# Altium PCB Copy of logger_layout_v2.PcbDoc
Units mil, origin at the board's own origin, x right, y up, seen from the top; angles counter-clockwise.
Board outline 600 x 600 mil, 4 copper layers (Top Layer, PWR, GND, Bottom Layer), stack 23.778 mil thick; 42 components, 76 nets, 174 pads, 71 vias.
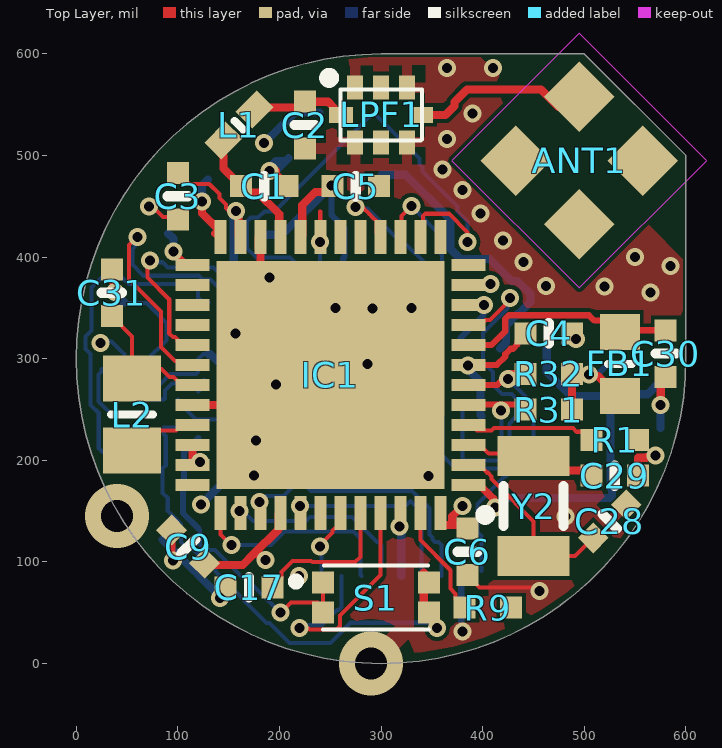
[diagram p0: Top Layer view]
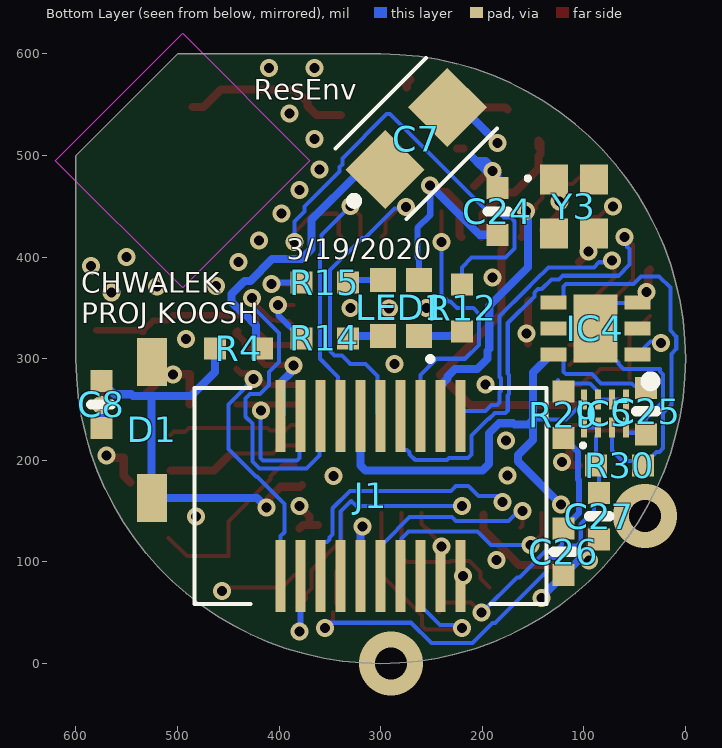
[diagram p1: Bottom Layer view, seen from below]
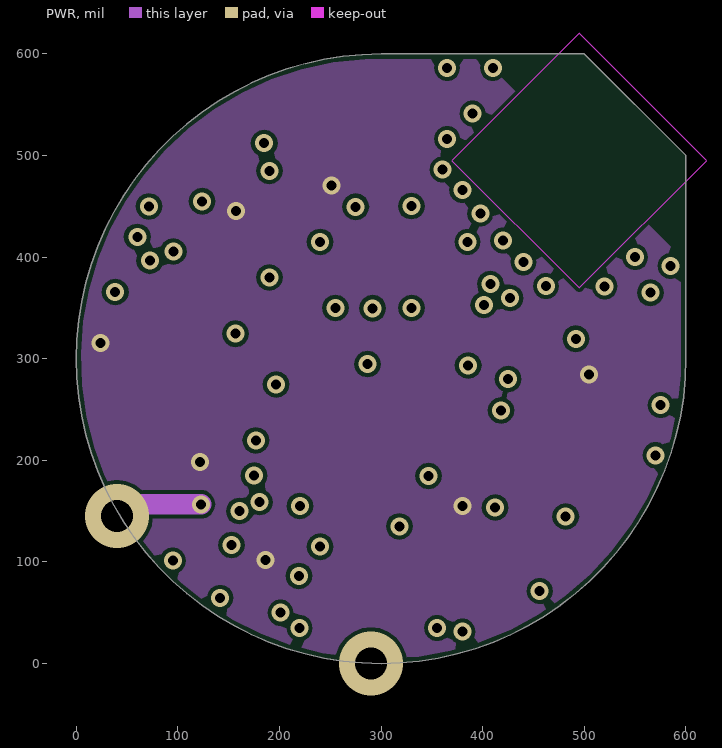
[diagram p2: PWR]
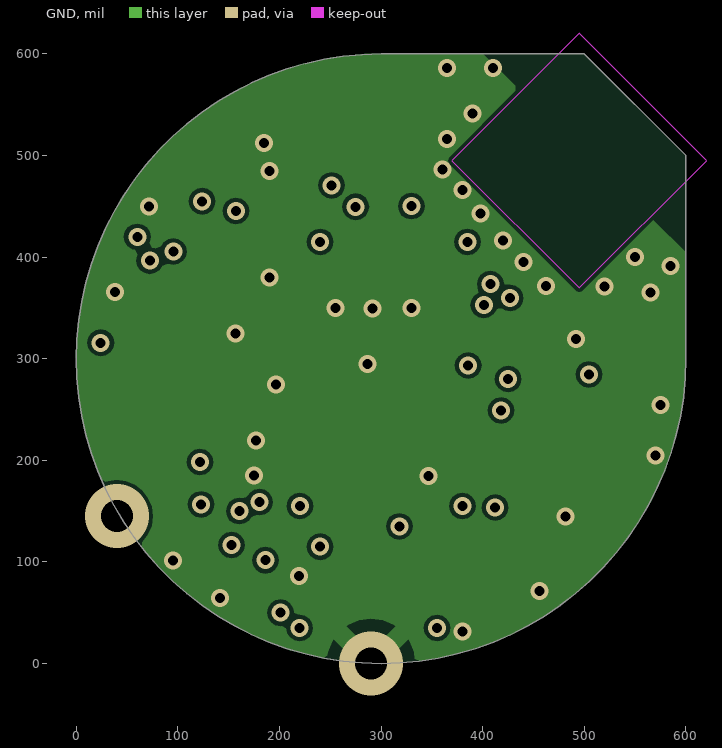
[diagram p3: GND]

## Layer stack, top to bottom
Top Solder: solder mask 0.394, Solder Resist, Dk 3.5
Top Layer: signal copper 1.417
Dielectric 2: prepreg 2.795, PP-006, Dk 4.1
PWR: signal copper 1.378
Dielectric 1: dielectric 12.598, FR-4, Dk 4.8
GND: signal copper 1.378
Dielectric 3: prepreg 2.795, PP-006, Dk 4.1
Bottom Layer: signal copper 1.417
Bottom Solder: solder mask 0.394, Solder Resist, Dk 3.5

## Board outline
600,300 cw(c300,300) 300,600 500,600 600,500

## Design rules (kind name [scope] priority, off if disabled: settings)
Clearance [All] p1: gap=4 ignorepadtopadclearanceinfootprint=FALSE except(0: Arc-Hole Track-Hole SMDPad-Hole THPad-Hole Via-Hole Fill-Hole Poly-Hole Region-Hole Text-Hole)
PlaneConnect PWR [InNet('GND') or InNet('3.3V') or InNet('VBAT')] p1: planeconnectstyle=Relief reliefexpansion=20 reliefentries=4 reliefconductorwidth=10 reliefairgap=10
PlaneConnect [All] p2: planeconnectstyle=Relief reliefexpansion=20 reliefentries=4 reliefconductorwidth=10 reliefairgap=10
PolygonConnect [All] p1: connectstyle=Relief reliefconductorwidth=10 reliefentries=4 polygonreliefangle="90 Angle" airgapwidth=10
RoutingVias [All] p1: holewidth=9.84 width=17.72 viastyle="Through Hole" minholewidth=9.84 minwidth=17.72 maxholewidth=9.84 maxwidth=17.72
SolderMaskExpansion [All] p1: expansion=4 istentingtop=FALSE
Width [All] p1: maxlimit=10 minlimit=4 preferedwidth=10 toplayer_maxwidth=8 toplayer_prefwidth=6 midlayer1_minwidth=10 midlayer2_minwidth=10 bottomlayer_maxwidth=8 bottomlayer_prefwidth=6 minimp=50.000000 maximp=50.000000 favimp=50.000000
29 further rules are at their usual default settings.

## Classes and differential pairs
component class logger_connector: J1
component class logger_periph: C28 C29 C30 C31 FB1 L2 R31 R32 Y2 Y3
component class logger_sensors: C17 LED1 R9 R12 R14 R15
component class logger_power: C24 C25 C26 C27 IC4 IC5 R29 R30 S1
component class logger_mcu: ANT1 C1 C2 C3 C4 C5 C6 C7 C8 C9 D1 IC1 L1 LPF1 R1 R4

## Components (designator, comment, footprint, x,y, rotation, side; value= is the part's Value field where it differs from the comment)
ANT1 "2065130001" 2065130001 495,495 r45 top
C1 "0.80pF" SMD-0402C 185,470 r90 top
C2 "0.30pF" SMD-0402C 225,530 r180 top
C3 "0.10µF" SMD-0402C 100,460 r0 top
C4 "0.10µF" SMD-0402C 465,325 r90 top
C5 "0.10µF" SMD-0402C 275,470 r90 top
C6 "100pF" SMD-0402C 385,110 r0 top
C7 "CPH3225A" CPH3225A 265,500 r135 bottom
C8 "0.10µF" SMD-0402C 575,255 r180 bottom
C9 "0.10µF" SMD-0402C 110,115 r225 top
C17 "10000pF" SMD-0402C 170,75 r90 top
C24 "1µF" SMD-0402C 185,445 r0 bottom
C25 "1µF" SMD-0402C 38.9,248.24 r180 bottom
C26 "1µF" SMD-0402C 120,110 r180 bottom
C27 "10000pF" SMD-0402C 85,145 r0 bottom
C28 "15pF" SMD-0402C 525,140 r135 top
C29 "15pF" SMD-0402C 530,185 r90 top
C30 "0.10µF" SMD-0402C 580,305 r0 top
C31 "4.7µF" SMD-0402C 35,365 r180 top
D1 "1N5819HW-7-F" SOD3716X145N 525,230 r90 bottom
FB1 "BLM18KG601SZ1D" BEADC1608X95N 535,295 r270 top
IC1 "STM32WB55CGU6" QFN50P700X700X65-49N-D 250,284.17 r180 top
IC4 "NCP718BMT330TBG" SON65P200X200X80-7N 88.66,330 r0 bottom
IC5 "74LVC2G00GS,115" 74AXP2T3407GSX 79.33,246.22 r180 bottom
J1 "0529910208" 0529910208 310,165 r0 bottom
L1 "LQG15HS2N7S02D" INDC1005X55N 160,530 r45 top
L2 "LBR2012T100K" INDC2012X145N 55,245 r90 top
LED1 "EAST1616RGBB6" EAST1616RGBB6 280,350 r180 bottom
LPF1 "LFL212G45TC1A007" LFL212G45TC1A007 300,540 r0 top
R1 "100k" SMD-0402-RES 530,220 r270 top
R4 "100" SMD-0402-RES 440,310 r270 bottom
R9 "1k" SMD-0402-RES 405,55 r90 top
R12 "110" SMD-0402-RES 220,350 r180 bottom
R14 "30" SMD-0402-RES 355,320 r90 bottom
R15 "24" SMD-0402-RES 355,375 r270 bottom
R29 "100k" SMD-0402-RES 120,245 r180 bottom
R30 "100k" SMD-0402-RES 65,195 r90 bottom
R31 "10k" SMD-0402-RES 465,250 r90 top
R32 "10k" SMD-0402-RES 465,285 r90 top
S1 "EVP-BB4A9B000" EVPBB2A9B000 285,65 r0 top
Y2 "NX3215SA-32.768K-STD-MUA-8" NX3215SA 450,155 r90 top
Y3 "XRCGB32M000F1H01R0" XRCGB32M000F1H01R0 110,450 r270 bottom

## Footprints (in the part's own frame and the unit in brackets; to place one, negate y for a bottom-side part, rotate by r counter-clockwise, add the part's x,y. Pads: shape width x height; smd on the part's side, far side on the other; paste and mask are expansions set on the pad)
74AXP2T3407GSX [mm]
  rect 0.15x0.5 smd: 1(-0.525,-0.35) 2(-0.175,-0.35) 3(0.175,-0.35) 4(0.525,-0.35) 5(0.525,0.35) 6(0.175,0.35) 7(-0.175,0.35) 8(-0.525,0.35)
  silkscreen extent -0.6,-0.85 -0.5,-0.75, body extent -0.67,-0.5 0.67,0.5, height 0.45
0529910208 [mm]
  rect 0.25x1.8 smd: 1(-2.25,-2) 2(-2.25,2) 3(-1.75,-2) 4(-1.75,2) 5(-1.25,-2) 6(-1.25,2) 7(-0.75,-2) 8(-0.75,2) 9(-0.25,-2) 10(-0.25,2) 11(0.25,-2) 12(0.25,2) 13(0.75,-2) 14(0.75,2) 15(1.25,-2) 16(1.25,2) 17(1.75,-2) 18(1.75,2) 19(2.25,-2) 20(2.25,2)
  silkscreen extent -4.4,-2.7 4.4,2.7, body extent -4.4,-2.7 4.4,2.7, height 2.28
2065130001 [mm]
  rect 1.25x1.25 smd: 1(1.125,1.125) 2(1.125,-1.125) 3(-1.125,-1.125) 4(-1.125,1.125)
  Keep-Out Layer region: -2.25,-2.25 2.25,-2.25 2.25,2.25 -2.25,2.25
  body extent -1.51,-1.48 1.49,1.52, height 4
BEADC1608X95N [mm]
  rect 0.9x1 smd: 1(-0.8,0) 2(0.8,0)
  silkscreen extent 0,-0.3 0,0.3, body extent -0.8,-0.4 0.8,0.4, height 0.95
CPH3225A [mm]
  rect 1.4x1.4 smd: 1(-0.8,0.3) 2(1.4,0.3)
  silkscreen extent -2,-0.95 1.9,1.55, body extent -1.36,-0.95 1.96,1.55, height 1.1
EAST1616RGBB6 [mm]
  rect 0.65x0.6 smd: 1(0.45,-0.7) 2(0.45,0.7) 3(-0.45,-0.7) 4(-0.45,0.7)
  silkscreen extent 0.73,-1.28 0.73,-1.28, body extent -0.79,-0.79 0.81,0.81, height 0.46
EVPBB2A9B000 [mm]
  rect 0.55x0.55 smd: 1(-1.075,0.375) 2(-1.075,-0.375) 3(1.575,-0.375) 4(1.575,0.375)
  silkscreen extent -1.85,-0.8 1.58,0.8, body extent -1.25,-0.9 1.75,0.9, height 0.51
INDC1005X55N [mm]
  rect 0.75x0.6 smd: 1(-0.55,0) 2(0.55,0)
  silkscreen extent 0,-0.15 0,0.15, body extent -0.5,-0.25 0.5,0.25, height 0.55
INDC2012X145N [mm]
  rect 1.15x1.45 smd: 1(-0.9,0) 2(0.9,0)
  silkscreen extent 0,-0.53 0,0.53, body extent -1,-0.63 1,0.63, height 1.45
LFL212G45TC1A007 [mm]
  rect 0.4x0.6 smd: 1(-0.65,0.685) 2(0,0.685) 3(0.65,0.685) 5(0.65,-0.685) 6(0,-0.685) 7(-0.65,-0.685)
  rect 0.6x0.4 smd: 4(1,0) 8(-1,0)
  silkscreen extent -1.42,-0.64 1.02,1.05, body extent -1,-0.5 1,0.45, height 0.87
NX3215SA [mm]
  rect 1x1.8 smd: 1(-1.25,0) 2(1.25,0)
  silkscreen extent -0.5,-0.75 0.5,0.75, body extent -1.6,-0.75 1.6,0.75, height 0.8
QFN50P700X700X65-49N-D [mm]
  rect 0.85x0.3 smd: 1(-3.45,2.75) 2(-3.45,2.25) 3(-3.45,1.75) 4(-3.45,1.25) 5(-3.45,0.75) 6(-3.45,0.25) 7(-3.45,-0.25) 8(-3.45,-0.75) 9(-3.45,-1.25) 10(-3.45,-1.75) 11(-3.45,-2.25) 12(-3.45,-2.75) 25(3.45,-2.75) 26(3.45,-2.25) 27(3.45,-1.75) 28(3.45,-1.25) 29(3.45,-0.75) 30(3.45,-0.25) 31(3.45,0.25) 32(3.45,0.75) 33(3.45,1.25) 34(3.45,1.75) 35(3.45,2.25) 36(3.45,2.75)
  rect 0.3x0.85 smd: 13(-2.75,-3.45) 14(-2.25,-3.45) 15(-1.75,-3.45) 16(-1.25,-3.45) 17(-0.75,-3.45) 18(-0.25,-3.45) 19(0.25,-3.45) 20(0.75,-3.45) 21(1.25,-3.45) 22(1.75,-3.45) 23(2.25,-3.45) 24(2.75,-3.45) 37(2.75,3.45) 38(2.25,3.45) 39(1.75,3.45) 40(1.25,3.45) 41(0.75,3.45) 42(0.25,3.45) 43(-0.25,3.45) 44(-0.75,3.45) 45(-1.25,3.45) 46(-1.75,3.45) 47(-2.25,3.45) 48(-2.75,3.45)
  rect 5.7x5.7 smd: 49(0,0)
  silkscreen extent -4,3.38 -3.75,3.62, body extent -3.55,-3.55 3.55,3.55, height 0.65
SMD-0402-RES [mm]
  rect 0.55x0.55 smd: 1(0,0.584) 2(0,-0.584)
  body extent -0.28,-0.57 0.27,0.58, height 0.41
SMD-0402C [mm]
  rect 0.55x0.55 smd: 1(0,0.584) 2(0,-0.584)
  silkscreen extent -0.25,0 0.25,0, body extent -0.25,-0.51 0.25,0.51, height 0.51
SOD3716X145N [mm]
  rect 1.2x0.75 smd: 1(-1.7,0) 2(1.7,0)
  body extent -1.85,-0.77 1.85,0.77, height 1.45
SON65P200X200X80-7N [mm]
  rect 0.65x0.35 smd: 1(-1.05,0.65) 2(-1.05,0) 3(-1.05,-0.65) 4(1.05,-0.65) 5(1.05,0) 6(1.05,0.65)
  rect 1.1x1.7 smd: 7(0,0)
  silkscreen extent -1.5,1.2 -1.25,1.45, body extent -1.05,-1 1.05,1, height 0.8
XRCGB32M000F1H01R0 [mm]
  rect 0.75x0.7 smd: 1(-0.675,-0.5) 2(0.675,-0.5) 3(0.675,0.5) 4(-0.675,0.5)
  silkscreen extent -0.75,-1.2 -0.65,-1.1, body extent -1,-0.8 1,0.8, height 0.8

## Part data
C1: library part GRM1555C1HR80BA01D, "CAP CER 0.8PF 50V NP0 0402", Digi-Key Part Number=490-6269-1-ND, Manufacturer="Murata Electronics North America", Operating Temperature="-55°C ~ 125°C", Package / Case="0402 (1005 Metric)", Ratings=-, Temperature Coefficient="C0G, NP0", Tolerance=±0.1pF, Voltage=50V, @ qty=0, Applications="General Purpose", Datasheets=http://www.murata.com/~/media/webrenewal/support/library/catalog/products/capacitor/mlcc/c02e.pdf, Factory Stock=0, Features=-, Height - Seated (Max)=-, Image=//media.digikey.com/Renders/Murata%20Renders/ZRB-SERIES-0402.jpg, Lead Spacing=-, Lead Style=-, Minimum Quantity=1, Mounting Type="Surface Mount, MLCC", Packaging="Cut Tape (CT)", Part Number=GRM1555C1HR80BA01D, Part Status=Active, Quantity Available=38847, Series=GRM, Size / Dimension="0.039\" L x 0.020\" W (1.00mm x 0.50mm)", Thickness (Max)="0.022\" (0.55mm)", Unit Price (USD)=0.1
C2: library part GRM1555C1HR30WA01D, "CAP CER 0.3PF 50V NP0 0402", Digi-Key Part Number=490-6261-1-ND, Manufacturer="Murata Electronics North America", Operating Temperature="-55°C ~ 125°C", Package / Case="0402 (1005 Metric)", Ratings=-, Temperature Coefficient="C0G, NP0", Tolerance=±0.05pF, Voltage=50V, @ qty=0, Applications="General Purpose", Datasheets=http://www.murata.com/~/media/webrenewal/support/library/catalog/products/capacitor/mlcc/c02e.pdf, Factory Stock=0, Features=-, Height - Seated (Max)=-, Image=//media.digikey.com/Renders/Murata%20Renders/ZRB-SERIES-0402.jpg, Lead Spacing=-, Lead Style=-, Minimum Quantity=1, Mounting Type="Surface Mount, MLCC", Packaging="Cut Tape (CT)", Part Number=GRM1555C1HR30WA01D, Part Status=Active, Quantity Available=61475, Series=GRM, Size / Dimension="0.039\" L x 0.020\" W (1.00mm x 0.50mm)", Thickness (Max)="0.022\" (0.55mm)", Unit Price (USD)=0.16
C3 C4 C5 C8 C9 C30: library part GCM155R71C104KA55D, "CAP CER 0.1UF 16V X7R 0402", Digi-Key Part Number=490-4759-1-ND, Manufacturer="Murata Electronics North America", Operating Temperature="-55°C ~ 125°C", Package / Case="0402 (1005 Metric)", Ratings=AEC-Q200, Temperature Coefficient=X7R, Tolerance=±10%, Voltage=16V, @ qty=0, Applications=Automotive, Datasheets=http://www.murata.com/~/media/webrenewal/support/library/catalog/products/capacitor/mlcc/c03e.ashx, Factory Stock=0, Features=-, Height - Seated (Max)=-, Image=//media.digikey.com/Renders/Murata%20Renders/ZRB-SERIES-0402.jpg, Lead Spacing=-, Lead Style=-, Minimum Quantity=1, Mounting Type="Surface Mount, MLCC", Packaging="Cut Tape (CT)", Part Number=GCM155R71C104KA55D, Part Status=Active, Quantity Available=734194, Series=GCM, Size / Dimension="0.039\" L x 0.020\" W (1.00mm x 0.50mm)", Thickness (Max)="0.022\" (0.55mm)", Unit Price (USD)=0.1
C6: library part GCM1555C1H101JA16D, "CAP CER 100PF 50V NP0 0402", Digi-Key Part Number=490-10669-1-ND, Manufacturer="Murata Electronics North America", Operating Temperature="-55°C ~ 125°C", Package / Case="0402 (1005 Metric)", Ratings=AEC-Q200, Temperature Coefficient="C0G, NP0", Tolerance=±5%, Voltage=50V, @ qty=0, Applications=Automotive, Datasheets=http://www.murata.com/~/media/webrenewal/support/library/catalog/products/capacitor/mlcc/c03e.ashx, Factory Stock=0, Features=-, Height - Seated (Max)=-, Image=//media.digikey.com/Renders/Murata%20Renders/ZRB-SERIES-0402.jpg, Lead Spacing=-, Lead Style=-, Minimum Quantity=1, Mounting Type="Surface Mount, MLCC", Packaging="Cut Tape (CT)", Part Number=GCM1555C1H101JA16D, Part Status=Active, Quantity Available=61397, Series=GCM, Size / Dimension="0.039\" L x 0.020\" W (1.00mm x 0.50mm)", Thickness (Max)="0.022\" (0.55mm)", Unit Price (USD)=0.1
C7: "Capacitor Polarised", Manufacturer_Name="Seiko Instruments Micro Energy", Mouser Part Number=628-CPH3225A, Datasheet Link=https://www.sii.co.jp/en/me/datasheets/chip-capacitor/cph3225a/, Height=1mm, Manufacturer_Part_Number=CPH3225A, Mouser Price/Stock=https://www.mouser.com/Search/Refine.aspx?Keyword=628-CPH3225A
C17 C27: library part GCM155R71H103KA55D, "CAP CER 10000PF 50V X7R 0402", Digi-Key Part Number=490-4762-1-ND, Manufacturer="Murata Electronics North America", Operating Temperature="-55°C ~ 125°C", Package / Case="0402 (1005 Metric)", Ratings=AEC-Q200, Temperature Coefficient=X7R, Tolerance=±10%, Voltage=50V, @ qty=0, Applications=Automotive, Datasheets=http://www.murata.com/~/media/webrenewal/support/library/catalog/products/capacitor/mlcc/c03e.ashx, Factory Stock=0, Features=-, Height - Seated (Max)=-, Image=//media.digikey.com/Renders/Murata%20Renders/ZRB-SERIES-0402.jpg, Lead Spacing=-, Lead Style=-, Minimum Quantity=1, Mounting Type="Surface Mount, MLCC", Packaging="Cut Tape (CT)", Part Number=GCM155R71H103KA55D, Part Status=Active, Quantity Available=650067, Series=GCM, Size / Dimension="0.039\" L x 0.020\" W (1.00mm x 0.50mm)", Thickness (Max)="0.022\" (0.55mm)", Unit Price (USD)=0.1
C24 C25 C26: library part GCM155C71A105KE38D, "CAP CER 1UF 10V X7S 0402", Digi-Key Part Number=490-13409-1-ND, Manufacturer="Murata Electronics North America", Operating Temperature="-55°C ~ 125°C", Package / Case="0402 (1005 Metric)", Ratings=AEC-Q200, Temperature Coefficient=X7S, Tolerance=±10%, Voltage=10V, @ qty=0, Applications=Automotive, Datasheets=http://www.murata.com/~/media/webrenewal/support/library/catalog/products/capacitor/mlcc/c03e.ashx, Factory Stock=0, Features=-, Height - Seated (Max)=-, Image=//media.digikey.com/Renders/Murata%20Renders/ZRB-SERIES-0402.jpg, Lead Spacing=-, Lead Style=-, Minimum Quantity=1, Mounting Type="Surface Mount, MLCC", Packaging="Cut Tape (CT)", Part Number=GCM155C71A105KE38D, Part Status=Active, Quantity Available=7240, Series=GCM, Size / Dimension="0.039\" L x 0.020\" W (1.00mm x 0.50mm)", Thickness (Max)="0.022\" (0.55mm)", Unit Price (USD)=0.12
C28 C29: library part GCM1555C1H150JA16D, "CAP CER 15PF 50V NP0 0402", Digi-Key Part Number=490-11147-1-ND, Manufacturer="Murata Electronics North America", Operating Temperature="-55°C ~ 125°C", Package / Case="0402 (1005 Metric)", Ratings=AEC-Q200, Temperature Coefficient="C0G, NP0", Tolerance=±5%, Voltage=50V, @ qty=0, Applications=Automotive, Datasheets=http://www.murata.com/~/media/webrenewal/support/library/catalog/products/capacitor/mlcc/c03e.ashx, Factory Stock=0, Features=-, Height - Seated (Max)=-, Image=//media.digikey.com/Renders/Murata%20Renders/ZRB-SERIES-0402.jpg, Lead Spacing=-, Lead Style=-, Minimum Quantity=1, Mounting Type="Surface Mount, MLCC", Packaging="Cut Tape (CT)", Part Number=GCM1555C1H150JA16D, Part Status=Active, Quantity Available=6185, Series=GCM, Size / Dimension="0.039\" L x 0.020\" W (1.00mm x 0.50mm)", Thickness (Max)="0.022\" (0.55mm)", Unit Price (USD)=0.1
C31: library part GRM153R60G475ME15D, "CAP CER 4.7UF 4V X5R 0402", Digi-Key Part Number=490-13231-1-ND, Manufacturer="Murata Electronics North America", Operating Temperature="-55°C ~ 85°C", Package / Case="0402 (1005 Metric)", Ratings=-, Temperature Coefficient=X5R, Tolerance=±20%, Voltage=4V, @ qty=0, Applications="General Purpose", Datasheets=http://psearch.en.murata.com/capacitor/product/GRM153R60G475ME15%23.pdf, Factory Stock=0, Features=-, Height - Seated (Max)=-, Image=//media.digikey.com/Renders/Murata%20Renders/ZRB-SERIES-0402.jpg, Lead Spacing=-, Lead Style=-, Minimum Quantity=1, Mounting Type="Surface Mount, MLCC", Packaging="Cut Tape (CT)", Part Number=GRM153R60G475ME15D, Part Status=Active, Quantity Available=9100, Series=GRM, Size / Dimension="0.039\" L x 0.020\" W (1.00mm x 0.50mm)", Thickness (Max)="0.013\" (0.33mm)", Unit Price (USD)=0.27
D1: "Diode", Manufacturer_Name="Diodes Inc.", Mouser Part Number=621-1N5819HW-F, RS Part Number=7082197P, Allied Price/Stock=http://www.alliedelec.com/diodes-inc-1n5819hw-7-f/70437201/, Allied_Number=70437201, Datasheet Link=http://www.diodes.com/_files/datasheets/ds30217.pdf, Height=1.45mm, Manufacturer_Part_Number=1N5819HW-7-F, Mouser Price/Stock=https://www.mouser.com/Search/Refine.aspx?Keyword=621-1N5819HW-F, RS Price/Stock=http://uk.rs-online.com/web/p/products/7082197P
FB1: "Ferrite Bead", Manufacturer_Name="Murata Electronics", Mouser Part Number=81-BLM18KG601SZ1D, Datasheet Link=http://www.murata.com/~/media/webrenewal/support/library/catalog/products/emc/emifil/c31e.ashx?la=en-gb, Height=0.95mm, Manufacturer_Part_Number=BLM18KG601SZ1D, Mouser Price/Stock=https://www.mouser.com/Search/Refine.aspx?Keyword=81-BLM18KG601SZ1D
IC1: "Integrated Circuit", Manufacturer_Name=STMicroelectronics, Mouser Part Number=511-STM32WB55CGU6, Datasheet Link=https://www.st.com/en/microcontrollers/stm32wb55cg.html, Height=0.65mm, Manufacturer_Part_Number=STM32WB55CGU6, Mouser Price/Stock=https://www.mouser.com/Search/Refine.aspx?Keyword=511-STM32WB55CGU6
IC4: "Integrated Circuit", Manufacturer_Name="ON Semiconductor", Mouser Part Number=863-NCP718BMT330TBG, RS Part Number=1861278, Datasheet Link=https://componentsearchengine.com/Datasheets/1/NCP718BMT330TBG.pdf, Height=0.8mm, Manufacturer_Part_Number=NCP718BMT330TBG, Mouser Price/Stock=https://www.mouser.com/Search/Refine.aspx?Keyword=863-NCP718BMT330TBG, RS Price/Stock=http://uk.rs-online.com/web/p/products/1861278
IC5: "Integrated Circuit", Manufacturer_Name=Nexperia, Datasheet Link=https://assets.nexperia.com/documents/data-sheet/74LVC2G00.pdf, Height=0.35mm, Manufacturer_Part_Number=74LVC2G00GS,115
J1: "Connector", Manufacturer_Name=Molex, Datasheet Link=https://www.molex.com/pdm_docs/sd/529910208_sd.pdf, Height=2.47mm, Manufacturer_Part_Number=0529910208
L1: "Inductor", Manufacturer_Name="Murata Electronics", Datasheet Link=https://www.arrow.com/en/products/lqg15hs2n7s02d/murata-manufacturing, Height=0.55mm, Manufacturer_Part_Number=LQG15HS2N7S02D
L2: "Inductor", Manufacturer_Name="TAIYO YUDEN", Mouser Part Number=963-LBR2012T100K, Datasheet Link=https://componentsearchengine.com/Datasheets/2/LBR2012T100K.pdf, Height=1.45mm, Manufacturer_Part_Number=LBR2012T100K, Mouser Price/Stock=https://www.mouser.com/Search/Refine.aspx?Keyword=963-LBR2012T100K
R1: library part ERJ-2RKF1003X, "RES SMD 100K OHM 1% 1/10W 0402", Digi-Key Part Number=P100KLCT-ND, Manufacturer="Panasonic Electronic Components", Operating Temperature="-55°C ~ 155°C", Package / Case="0402 (1005 Metric)", Power (Watts)="0.1W, 1/10W", Supplier Device Package=0402, Temperature Coefficient=±100ppm/°C, Tolerance=±1%, @ qty=1500, Composition="Thick Film", Datasheets=http://industrial.panasonic.com/www-cgi/jvcr13pz.cgi?E+PZ+3+AOA0002+ERJ2RKF1003X+7+WW, Factory Stock=0, Failure Rate=-, Features="Automotive AEC-Q200", Height - Seated (Max)="0.016\" (0.40mm)", Image=//media.digikey.com/Photos/Panasonic%20Photos/ERJ-PA2-Series.jpg, Minimum Quantity=1, Number of Terminations=2, Packaging="Cut Tape (CT)", Part Number=ERJ-2RKF1003X, Part Status=Active, Quantity Available=2645965, Series=ERJ, Size / Dimension="0.039\" L x 0.020\" W (1.00mm x 0.50mm)", Unit Price (USD)=0.00496
R4: library part ERJ-2RKF1003X, "RES SMD 100 OHM 5% 1/4W 0603", Digi-Key Part Number=P100KLCT-ND, Manufacturer="Panasonic Electronic Components", Operating Temperature="-55°C ~ 155°C", Package / Case="0603 (1608 Metric)", Power (Watts)="0.1W, 1/10W", Supplier Device Package=0603, Temperature Coefficient=±100ppm/°C, Tolerance=±1%, @ qty=1500, Composition="Thick Film", Datasheets=http://industrial.panasonic.com/www-cgi/jvcr13pz.cgi?E+PZ+3+AOA0002+ERJ2RKF1003X+7+WW, Factory Stock=0, Failure Rate=-, Features="Automotive AEC-Q200", Height - Seated (Max)="0.016\" (0.40mm)", Image=//media.digikey.com/Photos/Panasonic%20Photos/ERJ-PA2-Series.jpg, Minimum Quantity=1, Number of Terminations=2, Packaging="Cut Tape (CT)", Part Number=ERJ-2RKF1003X, Part Status=Active, Quantity Available=2645965, Series=ERJ, Size / Dimension="0.039\" L x 0.020\" W (1.00mm x 0.50mm)", Unit Price (USD)=0.00496
R9: library part ERJ-2GEJ102X, "RES SMD 1K OHM 5% 1/10W 0402", Digi-Key Part Number=P1.0KJCT-ND, Manufacturer="Panasonic Electronic Components", Operating Temperature="-55°C ~ 155°C", Package / Case="0402 (1005 Metric)", Power (Watts)="0.1W, 1/10W", Supplier Device Package=0402, Temperature Coefficient=±200ppm/°C, Tolerance=±5%, @ qty=1500, Composition="Thick Film", Datasheets=http://industrial.panasonic.com/www-cgi/jvcr13pz.cgi?E+PZ+3+AOA0001+ERJ2GEJ102X+7+WW, Factory Stock=0, Failure Rate=-, Features="Automotive AEC-Q200", Height - Seated (Max)="0.016\" (0.40mm)", Image=//media.digikey.com/Photos/Panasonic%20Photos/ERJ-PA2-Series.jpg, Minimum Quantity=1, Number of Terminations=2, Packaging="Cut Tape (CT)", Part Number=ERJ-2GEJ102X, Part Status=Active, Quantity Available=1939857, Series=ERJ, Size / Dimension="0.039\" L x 0.020\" W (1.00mm x 0.50mm)", Unit Price (USD)=0.00350
R12 R14 R15: library part ERJ-2GEJ103X, "RES SMD 110 OHM 5% 1/10W 0402", Digi-Key Part Number=P10KJCT-ND, Manufacturer="Panasonic Electronic Components", Operating Temperature="-55°C ~ 155°C", Package / Case="0402 (1005 Metric)", Power (Watts)="0.1W, 1/10W", Supplier Device Package=0402, Temperature Coefficient=±200ppm/°C, Tolerance=±5%, @ qty=1500, Composition="Thick Film", Datasheets=http://industrial.panasonic.com/www-cgi/jvcr13pz.cgi?E+PZ+3+AOA0001+ERJ2GEJ103X+7+WW, Factory Stock=0, Failure Rate=-, Features="Automotive AEC-Q200", Height - Seated (Max)="0.016\" (0.40mm)", Image=//media.digikey.com/Photos/Panasonic%20Photos/ERJ-PA2-Series.jpg, Minimum Quantity=1, Number of Terminations=2, Packaging="Cut Tape (CT)", Part Number=ERJ-2GEJ103X, Part Status=Active, Quantity Available=2560215, Series=ERJ, Size / Dimension="0.039\" L x 0.020\" W (1.00mm x 0.50mm)", Unit Price (USD)=0.00350
R29 R30: library part ERJ-2GEJ104X, "RES SMD 100K OHM 5% 1/10W 0402", Digi-Key Part Number=P100KJCT-ND, Manufacturer="Panasonic Electronic Components", Operating Temperature="-55°C ~ 155°C", Package / Case="0402 (1005 Metric)", Power (Watts)="0.1W, 1/10W", Supplier Device Package=0402, Temperature Coefficient=±200ppm/°C, Tolerance=±5%, @ qty=1500, Composition="Thick Film", Datasheets=http://industrial.panasonic.com/www-cgi/jvcr13pz.cgi?E+PZ+3+AOA0001+ERJ2GEJ104X+7+WW, Factory Stock=0, Failure Rate=-, Features="Automotive AEC-Q200", Height - Seated (Max)="0.016\" (0.40mm)", Image=//media.digikey.com/Photos/Panasonic%20Photos/ERJ-PA2-Series.jpg, Minimum Quantity=1, Number of Terminations=2, Packaging="Cut Tape (CT)", Part Number=ERJ-2GEJ104X, Part Status=Active, Quantity Available=2387986, Series=ERJ, Size / Dimension="0.039\" L x 0.020\" W (1.00mm x 0.50mm)", Unit Price (USD)=0.00350
R31 R32: library part ERJ-2GEJ103X, "RES SMD 10K OHM 5% 1/10W 0402", Digi-Key Part Number=P10KJCT-ND, Manufacturer="Panasonic Electronic Components", Operating Temperature="-55°C ~ 155°C", Package / Case="0402 (1005 Metric)", Power (Watts)="0.1W, 1/10W", Supplier Device Package=0402, Temperature Coefficient=±200ppm/°C, Tolerance=±5%, @ qty=1500, Composition="Thick Film", Datasheets=http://industrial.panasonic.com/www-cgi/jvcr13pz.cgi?E+PZ+3+AOA0001+ERJ2GEJ103X+7+WW, Factory Stock=0, Failure Rate=-, Features="Automotive AEC-Q200", Height - Seated (Max)="0.016\" (0.40mm)", Image=//media.digikey.com/Photos/Panasonic%20Photos/ERJ-PA2-Series.jpg, Minimum Quantity=1, Number of Terminations=2, Packaging="Cut Tape (CT)", Part Number=ERJ-2GEJ103X, Part Status=Active, Quantity Available=2560215, Series=ERJ, Size / Dimension="0.039\" L x 0.020\" W (1.00mm x 0.50mm)", Unit Price (USD)=0.00350
S1: "Switch", Manufacturer_Name=Panasonic, Mouser Part Number=667-EVP-BB4A9B000, Datasheet Link=https://industrial.panasonic.com/ac/cdn/e/control/switch/light-touch/catalog/sw_lt_eng_2616s.pdf, Height=0mm, Manufacturer_Part_Number=EVP-BB4A9B000, Mouser Price/Stock=https://www.mouser.com/Search/Refine.aspx?Keyword=667-EVP-BB4A9B000
Y2: "Crystal or Oscillator", Manufacturer_Name=NDK, Mouser Part Number=344-NX3215SA32768K8, Datasheet Link=http://www.ndk.com/images/products/catalog/c_NX3215SA-STD-MUA-14_e.pdf, Manufacturer_Part_Number=NX3215SA-32.768K-STD-MUA-8, Mouser Price/Stock=https://www.mouser.com/Search/Refine.aspx?Keyword=344-NX3215SA32768K8
Y3: "Crystal or Oscillator", Manufacturer_Name="Murata Electronics", Mouser Part Number=81-XRCGB32M000F1H01R, Datasheet Link=https://www.murata.com/en-eu/products/productdetail?partno=XRCGB32M000F1H01R0, Height=0.7mm, Manufacturer_Part_Number=XRCGB32M000F1H01R0, Mouser Price/Stock=https://www.mouser.com/Search/Refine.aspx?Keyword=81-XRCGB32M000F1H01R

## Via types
v1: diameter 17.72, hole 9.84, Top Layer to Bottom Layer, tented both sides, 66 vias
v2: diameter 17.72, hole 9.84, Top Layer to Bottom Layer, 3 vias
v3: diameter 62.99, hole 31.5, Top Layer to Bottom Layer, 2 vias

## Nets (pads, with @x,y where several pads share a name; then routed paths per layer and width w, separated by ;. In a path a pad name is that pad's centre, name@x,y a point inside that pad or via, vN(x,y) a via of type N, cw(c..) or ccw(c..) an arc to the next point about the centre after c; other vN are vias at no path point)
3.3V: C3.1 C5.1 C6.1 C9.1 C24.1 D1.2 FB1.2 IC1.20 IC1.23 IC1.34 IC1.35 IC1.40 IC1.48 IC4.1 J1.3 LED1.2 R31.2 R32.2 | length 917.9
  Top Layer w4: C3.1 111.16,471.84 130.83,471.84 140.71,461.96 140.71,458.32 147.37,451.66 147.37,448.31 v1@153.64,442.05
  Top Layer w8: IC1.35@105,195 105.59,195.59 IC1.35 IC1.35@123.59,195.59 ; IC1.35@114.17,198.31 IC1.34 ; v1(121.69,198.31) 121.69,197.5 IC1.35@123.59,195.59 ; C9.1@126.26,96.95 163.75,96.95 174.48,107.68 ; v1(157.06,445.48) 157.06,442.85 159.51,440.4 159.51,421.91 IC1.23 ; v1(186.18,101.71) 180.21,107.68 174.48,107.68 ; IC1.40@198.88,146.85 198.88,132.09 174.48,107.68 ; IC1.20 222.38,421.91 222.38,451.41 235.17,464.2 246.2,464.2 C5.1 ; IC1.48@361.8,136.54 361.86,136.49 370,136.49 ; C6.1@380,133 376.51,136.49 370,136.49 ; v2(380,155) 370,145 370,136.49 ; R31.2@488,255 R32.2 488.21,284.79 504.37,284.79 v1(504.58,284.58) ; v1@505,283.14 513.39,283.14 533.03,263.5 FB1.2 ; IC1.35@123.59,195.59 123.69,195.49 IC1.35@123.61,195.59
  GND w10: v1@22.24,317.47 v1(24.02,315.7)
  Bottom Layer w4: v1(24.02,315.7) 29.56,315.7 31.51,317.65 32.04,317.11 34.62,317.11 IC4.1
  Bottom Layer w6: J1.3@240.64,244.2 J1.3 ; v1(251.31,470.69) 251.31,441.42 263.86,428.87 263.86,400.12 262.28,398.54 LED1.2 ; v1(504.58,284.58) 513.24,284.58 525,296.34 D1.2
  Bottom Layer w8: v1@120,200 v1(121.69,198.31) ; v1(157.06,445.48) 155,443.41 155,390 193.17,351.83 193.17,309.55 195,307.72 195,300 205,290 226.83,290 234.34,282.49 234.34,280.66 J1.3@238.31,276.69 ; C24.1 202.62,422 v1(251.31,470.69)
3.3V_IMU: 
3.3V_MIC: 
3.3V_PWR: 
3.3V_TP: 
5V: 
BLUE_LED: IC1.11 R15.2 | length 52.2
  Top Layer w4: IC1.11 386.26,373.19 407.09,373.19 v1(407.53,373.63)
  Bottom Layer w6: R15.2 406.16,375 v1(407.53,373.63)
BOOT0: IC1.4 R1.2 | length 135.8
  Top Layer w4: IC1.4@377.56,234.96 388.39,234.96 394.17,229.18 408.54,229.18 411.25,231.9 488.75,231.9 492.52,228.13 503.87,228.13 R1.2@507,225
GND: C1.2 C2.1 C3.2 C4.2 C6.2 C7.2 C8.2 C9.2 C17.1 C24.2 C25.2 C26.2 C27.1 C28.2 C29.2 C30.2 C31.2 IC1.22 IC1.32 IC1.49 IC4.3 IC4.7 IC5.4 J1.2 J1.18 LPF1.1 LPF1.3 LPF1.5 LPF1.7 R1.1 | length 1219.1
  Top Layer w4: v1(71.45,450) 75,450 85.52,439.48 97.52,439.48 C3.2 ; C6.2 397,75 455,75 456.09,73.91 v1(456.09,71.33)
  Top Layer w8: C31.2 36.65,386.35 36.65,367.34 v1(38.3,365.69) ; C9.2 93.74,102.58 v1(95,101.31) ; IC1.32@105.91,254.65 IC1.32 212.2,254.65 241.73,284.17 181.1,344.8 181.1,407.27 179.2,409.17 IC1.22@179.2,420 ; v1(141.65,64.65) 144.65,64.65 C17.1@145,65 ; IC1.49@153.9,357.3 155,356.19 IC1.49@155,315 ; v1@196.44,485 v1(190,485) 193,485 C1.2 ; C2.1@218.44,507 C2.1 ; v1@218.99,86.01 v1(218.99,86.26) ; LPF1.1@270.54,574.78 274.41,570.9 LPF1.1 ; C29.2@546.17,178.17 C29.2 553,202.5 560.63,202.5 561.27,203.14 568.14,203.14 v2(570,205) ; v1(575.16,254.31) 575.16,277.16 C30.2 C30.2@576.64,285.36
  Bottom Layer w4: IC4.3 48.02,354.89 69.01,354.89 88.66,335.23 IC4.7 88.66,318.19 69.01,298.54 68.46,298.54 66.12,296.19 66.12,295.04 61.08,290 25,290 25,287.49 22,284.49 22,258 38.9,241.1 C25.2 40.81,227.16 57.71,227.16 58.66,228.11 IC5.4 ; v1(71.45,450) v1@75,450 ; v1@378.9,38.9 380,37.8 v1(380,31.31)
  Bottom Layer w6: v1@378.9,38.9 J1.18
  Bottom Layer w8: v1(38.3,365.69) 38.53,365.46 38.53,358.48 41.42,355.59 IC4.3 ; C27.1 113.17,93.83 C26.2@116.09,90.91 ; C26.2 141.65,65.35 v1(141.65,64.65) ; v2(184.93,512.21) 215.05,542.33 C7.2@239.38,542.33 ; C24.2 185,483 196.71,494.71 206.14,494.71 v1@196.44,485 ; 208.79,497.35 v1@196.44,485 ; v1(218.99,86.26) J1.2 ; C8.2 575.08,232.08 575.08,254.24 v1(575.16,254.31) ; v1@196.44,485 v1(190,485) v1@196.44,485
  other v1: 481.65,144.65 175,185 346.65,184.65 176.65,219.65 196.65,274.65 286.65,294.65 491.65,319.65 156.65,324.65 255,350 291.65,349.65 330,350 565,365 520,371.31 462.19,371.5 190,380 585,391.31 440,395 550,400 420,416.31 397.56,442.93 379.85,466.16 360.45,486.23 365,516.31 390,541.31 365,586.31 410,586.31
  other v3: 290,0
GREEN_LED: IC1.10 R14.1 | length 57.8
  Top Layer w4: IC1.10 400.89,353.07 v1(401.07,352.9)
  Bottom Layer w6: R14.1 400.83,342.83 400.83,350.83 401.07,351.07 v1(401.07,352.9)
I2C1_SCL: IC1.5 J1.17 R31.1 | length 202.5
  Top Layer w6: IC1.5@377.91,255 v1@418.05,255 ; v1(418.05,249.07) v1@418.05,255 ; R31.1@442,255 v1@418.05,255
  Bottom Layer w4: J1.17@380,247.64 380,202.34 382.34,200 416.02,200 418.36,202.34 418.36,248.76 v1(418.05,249.07)
I2C1_SDA: IC1.6 J1.20 R32.1 | length 292.8
  Top Layer w6: IC1.6@377.56,274.33 414.33,274.33 ; 415.86,275.86 425.69,285.69 437.69,285.69 R32.1@442,290
  Bottom Layer w4: J1.20@398.58,91.26 398.58,125.51 394.86,129.23 394.86,157.21 421.65,184 422.65,184 450,211.35 450,255 v1(425,280)
I2S_FS: 
I2S_MCLK: IC1.12
I2S_SCK: 
I2S_SD: IC1.36
IMU_CLK_IN: 
IMU_CLK_OUT: 
IMU_EN: IC1.46 J1.12 | length 52.5
  PWR w10: v1(317.98,135) v1@319.98,135
  Bottom Layer w8: v1(317.98,135) 319.68,135 319.84,134.84 J1.12
IMU_INT: IC1.9 J1.15 | length 360
  Top Layer w4: IC1.9@386.59,333.39 390.49,337.29 402.16,337.29 402.9,338.04 407.22,338.04 426.95,357.76 v1(426.95,359.78)
  Bottom Layer w4: J1.15 360.35,242.6 360.35,204.65 373,192 419.33,192 426.36,199.03 426.36,236.36 432.91,242.91 432.91,260.78 428.54,265.14 418.85,265.14 410,273.99 410,286.86 400.17,296.69 400.17,325.17 424.36,349.36 424.36,357.19 v1(426.95,359.78)
LIGHT_INT: IC1.30 J1.7 | length 599.1
  Top Layer w4: v1(60,420) 51.83,411.83 51.83,378.17 83.44,346.56 83.44,311.66 97.18,297.92 110.27,297.92 IC1.30
  Bottom Layer w4: v1(60,420) 57.38,417.38 57.38,410.18 55.14,407.94 55.14,392.68 66.16,381.66 120.89,381.66 124.54,378 132,378 141.52,368.48 145.28,368.48 148.8,364.96 148.8,361.2 175,335 175,285.33 173.79,284.12 173.79,265.18 175,263.97 175,248.85 177.34,246.51 187.78,246.51 193.69,240.6 194.4,240.6 210.5,224.5 210.5,205.82 214.01,202.31 232.69,202.31 234.84,200.16 266.05,200.16 271.71,205.82 271.71,207.96 274.05,210.31 277.55,210.31 280.47,213.23 J1.7
MIC_EN: 
MIC_ENV: IC1.19 J1.5 | length 292.4
  Top Layer w4: v1(240,415) 240,444.84 240.08,444.92 240.08,420.08 IC1.19
  Bottom Layer w4: v1(240,415) 240,362.86 233.31,356.17 231.17,356.17 225,350 208.92,350 203.17,344.25 203.17,313.69 216.86,300 245,300 260.79,284.21 J1.5
MIC_SIG: IC1.13
NetAC1_4: 
NetAC1_9: 
NetAC1_17: 
NetANT1_1: ANT1.1 LPF1.4 | length 165.5
  Top Layer w8: LPF1.4 363.31,540 372.18,548.87 372.18,552.81 384.37,565 457.22,565 474.58,547.64 ANT1.1@485,547.64
NetC2_2: C2.2 L1.2 LPF1.8 | length 96.2
  Top Layer w8: L1.2 177.4,547.4 219.4,547.4 C2.2 247.63,553 252.82,547.81 252.82,543.87 256.69,540 LPF1.8
NetC7_1: C7.1 R4.1 | length 278.5
  Bottom Layer w8: C7.1@300.62,481.08 323.92,481.08 368.14,436.86 368.14,408.02 378.02,398.14 406.86,398.14 428.36,376.64 433.93,376.64 447.01,363.56 447.01,355.99 434.83,343.82 433.89,343.82 422.9,332.83 422.9,315.9 R4.1
NetC18_1: 
NetC19_2: 
NetC20_1: 
NetC20_2: 
NetC26_1: C26.1 R29.2 S1.1 S1.2 | length 295.7
  Top Layer w4: v1(200.97,50) 211.2,60.24 S1.2@237.68,60.24 ; S1.2 S1.1
  Bottom Layer w4: C26.1 121.48,131.52 121.48,117.14 126.8,111.83 136.63,111.83 163.57,84.88 166.08,84.88 v1(200.97,50)
  Bottom Layer w6: C26.1 105,148 105,180.45 105.83,181.27 105.83,207.83 R29.2
NetC27_2: C27.2 IC5.1 IC5.2 R30.1 S1.3 S1.4 | length 493.4
  Top Layer w4: S1.3 347.01,43.38 350.39,40 355,35.39 v1(355,35)
  Top Layer w8: S1.3@342.01,60.24 S1.4@342.01,89.76
  Bottom Layer w4: IC5.1 IC5.2 86.22,225.55 88,223.77 R30.1 85,192 C27.2 90,163 90,150.27 103.17,137.1 103.17,119.69 106.69,116.17 111.14,116.17 123.49,103.83 133.31,103.83 136.83,100.31 136.83,90.49 187.31,40 189.95,40 209.89,20.07 249.99,20.07 270.06,40.14 349.86,40.14 v1(355,35)
NetD2_2: 
NetDS1_1: 
NetDS1_2: 
NetIC1_17: IC1.17
NetIC1_18: IC1.18
NetIC2_2: 
NetIC2_3: 
NetIC2_6: 
NetIC3_8: 
NetIC5_5: IC5.5 IC5.6 IC5.7 R29.1 | length 88.3
  Bottom Layer w4: IC5.5 IC5.6 IC5.7 87.17,260.95 87.17,268.52 93.64,274.98 93.7,274.98 94.56,275.84 105.44,275.84 105.57,275.71 119.65,275.71 120.38,274.98 123.66,274.98 125.5,276.83 125.5,279.1 ; R29.1 R29.1@125,273
NetLED1_1: LED1.1 R12.2 | length 42.4
  Bottom Layer w8: R12.2@223,330 230.56,322.44 LED1.1
NetLED1_3: LED1.3 R14.2 | length 34.3
  Bottom Layer w8: LED1.3 R14.2@332,322.44
NetLED1_4: LED1.4 R15.1 | length 35.3
  Bottom Layer w4: R15.1@329.44,377.56 R15.1
  Bottom Layer w6: LED1.4 R15.1@329.44,377.56
NetP1_1: R9.2
NetP2_1: 
NRST: C4.1 IC1.7 J1.19 | length 129.6
  Top Layer w6: IC1.7 414.02,294.02 422.17,302.17 422.17,304.55 427.45,309.83 429.83,309.83 434.17,314.17 434.17,317.17 C4.1
  Top Layer w8: C4.1@440.87,326.96 442,325.83 C4.1
  Bottom Layer w8: v1(385.68,293.43) 385.68,290.8 388.35,288.12 388.35,286.65 397.66,277.34 397.66,244.66 J1.19
PWR_EN: IC4.4 IC5.3 R30.2 | length 381
  Bottom Layer w4: IC5.3@72.44,224.94 72.44,209.7 61.97,199.23 46.23,199.23 R30.2 33.17,203.83 28.58,208.42 25.58,208.42 22.07,211.93 22.07,246.62 14,254.69 14,304.7 9.16,309.54 9.16,321.85 15,327.69 15,370 26,381 44,381 51.34,373.66 117.57,373.66 119.91,371.31 119.91,360.48 124.8,355.59 IC4.4
RCC_OSC32_IN: C28.1 IC1.2 Y2.1 | length 196.7
  Top Layer w4: IC1.2 396.65,195.59 404.43,187.81 405.05,187.81 408.56,184.3 408.56,181.44 413.47,176.53 450,140 Y2.1 490.79,105.79 C28.1
  Top Layer w8: IC1.2@385.83,194.49 IC1.2@393.29,194.49
RCC_OSC32_OUT: C29.1 IC1.3 Y2.2 | length 134.9
  Top Layer w4: IC1.3@377.56,215.28 378.03,214.81 397.95,214.81 405.91,206.85 442.36,206.85 Y2.2@445,204.21
  Top Layer w8: Y2.2 464.21,190 C29.1@507,190
RCC_OSC_IN: IC1.25 Y3.3 | length 34.5
  Top Layer w8: v1(95.51,405.51) 95.51,404.49 IC1.25@105,395
  Bottom Layer w8: Y3.3 95.51,418.24 v1(95.51,405.51)
RCC_OSC_OUT: IC1.24 Y3.1 | length 64
  Top Layer w8: v1(123.85,454.98) 123.85,443.16 140.24,426.77 IC1.24@136.73,423.27
  Bottom Layer w8: v1(123.85,454.98) 123.85,470.74 Y3.1
RED_LED: IC1.14 R12.1 | length 519.5
  Top Layer w4: IC1.14 341.32,422.73 341.32,440.39 343.66,442.73 366.66,442.73 385,424.39 v1(385,415)
  Bottom Layer w4: R12.1 220,390 210.49,399.51 177.35,399.51 168.17,408.69 168.17,435.31 171.69,438.83 178.83,438.83 185,445 195,445 290.84,540.84 294.16,540.84 337.8,497.2 337.8,491.36 340.6,488.57 340.6,484.4 375,450 375,445 385,435 v1(385,415)
RF_OUT: C1.1 IC1.21 L1.1 | length 132.1
  Top Layer w8: L1.1@144.69,508.27 L1.1 142.6,512.6 142.6,501.55 144.69,499.47 144.69,487.31 C1.1 168.21,463.79 178.41,463.79 199.69,442.51 199.69,421.1 IC1.21
SPI1_MISO: IC1.15 J1.13 | length 262.2
  Top Layer w4: IC1.15 319.99,421.09 319.99,440.39 v1(329.8,450.2)
  Bottom Layer w4: v1(329.8,450.2) 358.14,421.86 358.14,403.88 360,402.02 360,300 342.05,282.05 342.05,246.27 J1.13
SPI1_MOSI: IC1.16 J1.9 | length 321.1
  Top Layer w4: v1(274.95,449.59) 276.77,447.78 282.87,447.78 287.91,442.73 291.43,439.22 295.31,435.34 295.31,423.91 IC1.16
  Bottom Layer w4: v1(274.95,449.59) 276.77,447.78 286.46,447.78 315.28,418.97 318.17,418.97 350,387.14 350,307.86 345.31,303.17 338.17,303.17 330,295 315,295 303.08,283.08 303.08,246.66 J1.9
SPI1_SCK: IC1.43 J1.4 | length 86.2
  Top Layer w4: v1(240,115) 240,120.45 241.69,118.76 252.06,129.13 252.06,130.82 254.86,133.61 255.94,133.61 259.84,137.52 IC1.43
  Bottom Layer w4: v1(240,115) 240,119.04 240.14,118.9 J1.4@241.1,118.9 ; J1.4@241.1,91.26 J1.4@241.1,118.9 ; J1.4@241.1,118.9 241.1,115 J1.4@241.1,118.9
SUPERCAP: C8.1 D1.1 IC1.1 R4.2 | length 418
  Top Layer w8: IC1.1@377.56,175.91 379.47,174 398.56,174 410.35,162.21 410.35,155.41 v1(412.21,153.55)
  Bottom Layer w8: v1(412.21,153.55) 421.76,163.07 D1.1 527.34,165.41 527.34,171.44 525.77,173.02 525.77,261.74 527.34,263.31 ; R4.2 463,287 486.69,263.31 527.34,263.31 ; C8.1 562,265 545.6,265 543.91,263.31 527.34,263.31
SYS_SWCLK: IC1.41 J1.14 | length 189.2
  Bottom Layer w4: v1(220,155) 324.06,155 329.06,160 339.53,149.53 J1.14
SYS_SWDIO: IC1.39 J1.16 | length 260.9
  PWR w10: v1(180.3,158.9) v1@181.1,158.9
  Bottom Layer w4: v1@180,165 180,159.21 v1(180.3,158.9) ; v1@180.3,165 203.99,165 213.85,174.86 226.15,174.86 231.01,170 330.37,170 347.53,152.84 347.53,127.1 350.45,124.18 350.45,122.04 352.79,119.69 356.29,119.69 359.21,116.77 J1.16
TP_EN: IC1.45 J1.6 | length 249.8
  Top Layer w4: v1(219.8,34.93) 219.87,35 227.78,35 229.37,33.41 255.99,33.41 259.5,36.92 259.5,47.46 299.21,87.17 IC1.45
  Bottom Layer w4: v1(219.8,34.93) 222.42,37.55 228.65,37.55 229,37.9 241.58,37.9 256.51,52.83 257.87,52.83 260.79,55.75 J1.6
TP_INT: IC1.29 J1.1 | length 370.9
  Top Layer w4: v1(72.32,396.52) 70,394.2 70,380 91.44,358.56 91.44,325 94.96,321.48 97.1,321.48 99.44,319.14 99.44,317.61 103.35,313.7 IC1.29
  Bottom Layer w4: v1(72.32,396.52) 73.83,395 85,395 90,390 135,390 148.52,376.48 148.59,376.48 156.8,368.28 156.8,368.2 183,342 183,282.01 181.79,280.8 181.79,268.5 183,267.29 183,256.85 185.34,254.51 191.09,254.51 196.86,248.74 J1.1@221.42,248.74
TSC_G2_IO1: C17.2 IC1.44 | length 147.1
  Top Layer w4: C17.2 201.83,83.83 201.83,90.11 212.84,101.12 231.18,101.12 232.54,99.76 274.29,99.76 279.53,105 IC1.44
TSC_G2_IO3: 
TSC_G2_IO4: IC1.47 R9.1 | length 111.3
  Top Layer w4: IC1.47 338.58,121.42 368.17,91.83 368.17,73.69 373.36,68.5 373.36,63.64 R9.1
USB_DN: IC1.37 J1.8 | length 208.8
  Top Layer w4: IC1.37 141.73,127.17 149.93,118.97 150.49,118.97 v1(152.79,116.67)
  Bottom Layer w4: v1(152.79,116.67) 191.67,116.67 204.86,129.86 272.8,129.86 279.65,123.01 279.65,87.08 J1.8
USB_DP: IC1.38 J1.10 | length 193.4
  Top Layer w4: v1(160.5,150) 160.5,135.63 IC1.38@162.32,133.81
  Bottom Layer w4: v1(160.5,150) 164.21,150 174.07,140.14 226.15,140.14 230.06,144.04 271.53,144.04 295.88,119.69 297.24,119.69 300.55,116.38 J1.10@300.55,97.18
VBAT: C25.1 IC4.6 IC5.8 J1.11 | length 711
  PWR w10: v3(40,145) 54.34,145 v3@66.01,156.67
  PWR w20: v3@66.01,156.67 v1(122.79,156.67)
  Bottom Layer w4: C25.1@30,273 50.38,273 53.22,275.84 83.18,275.84 92.17,284.83 117.57,284.83 119.91,287.17 119.91,299.52 124.8,304.41 IC4.6 ; IC5.8 100,253.24 100.95,252.29 105.57,252.29 117.86,240 150,240
  Bottom Layer w8: v1(122.79,156.67) 164.92,198.8 164.92,205.08 150,220 150,240 ; IC4.6 132.11,304.41 150,286.52 150,240 ; J1.11 319.84,194.84 315.16,190.16 199.84,190.16 193.51,196.49 193.51,226.63 183.63,236.51 169.67,236.51 168.47,235.31 154.69,235.31 150,240
VDDA/VREF: C30.1 FB1.1 IC1.8 | length 232.2
  Top Layer w4: FB1.1@533.38,326.5 FB1.1
  Top Layer w6: IC1.8@377.56,313.7 408.7,313.7 422.17,327.17 422.17,339.31 425.69,342.83 504.56,342.83 509.83,337.55 523.94,337.55 FB1.1 ; FB1.1@533.38,326.5 534.89,328 C30.1
VFBSMPS: C31.1 IC1.31 L2.2 | length 135.7
  Top Layer w4: C31.1 55,322 L2.2@55,290.43 ; L2.2 L2.2@55,290.43 ; IC1.31 103.35,274.33 95.57,282.11 91.58,282.11 83.69,290 55.43,290 L2.2@55,290.43
VLXSMPS: IC1.33 L2.1 | length 71.4
  Top Layer w4: L2.1@45,229.57 97.95,229.57 103.35,234.96 IC1.33
pads on no net: ANT1.2 ANT1.3 ANT1.4 C5.2 IC1.26 IC1.27 IC1.28 IC1.42 IC4.2 IC4.5 LPF1.2 LPF1.6 Y3.2 Y3.4

## Polygon pours and split planes (outlines as drawn)
GND on GND "Top Layer-GND" (solid, remove dead copper, pour order 2): 300,600 ccw(c300,300) 600,300 600,405 400,600
3.3V on PWR "Top Layer-GND 1" (solid, remove dead copper, pour order 3): 595,300 cw(c300,300) 300,595 400,595 595,400
GND on Top Layer "Top Layer-GND 1" (solid, remove dead copper, pour order 1): 596.94,303.07 cw(c303.16,303.06) 303.16,596.84 398.16,596.84 596.94,398.06

## Silkscreen, mask and mechanical layers (free items; w line width, h text height)
Bottom Overlay:
  text "ResEnv" at 425,555 h20
  text "3/19/2020" at 392.44,398.14 h20
  text "CHWALEK / PROJ KOOSH" at 595,335 h20
Mechanical Board Shape:
  the board outline again, w3.94